# Altium PCB PCB_LED_6_ESP8266_0625.PcbDoc
Units mm, origin at the board's own origin, x right, y up, seen from the top; angles counter-clockwise.
Board outline 144 x 34 mm, 4 copper layers (Top Layer, Internal Plane 1, Internal Plane 2, Bottom Layer), stack 0.462 mm thick; 32 components, 31 nets, 212 pads, 244 vias.
Unrouted connection lines stored in the file: 6.
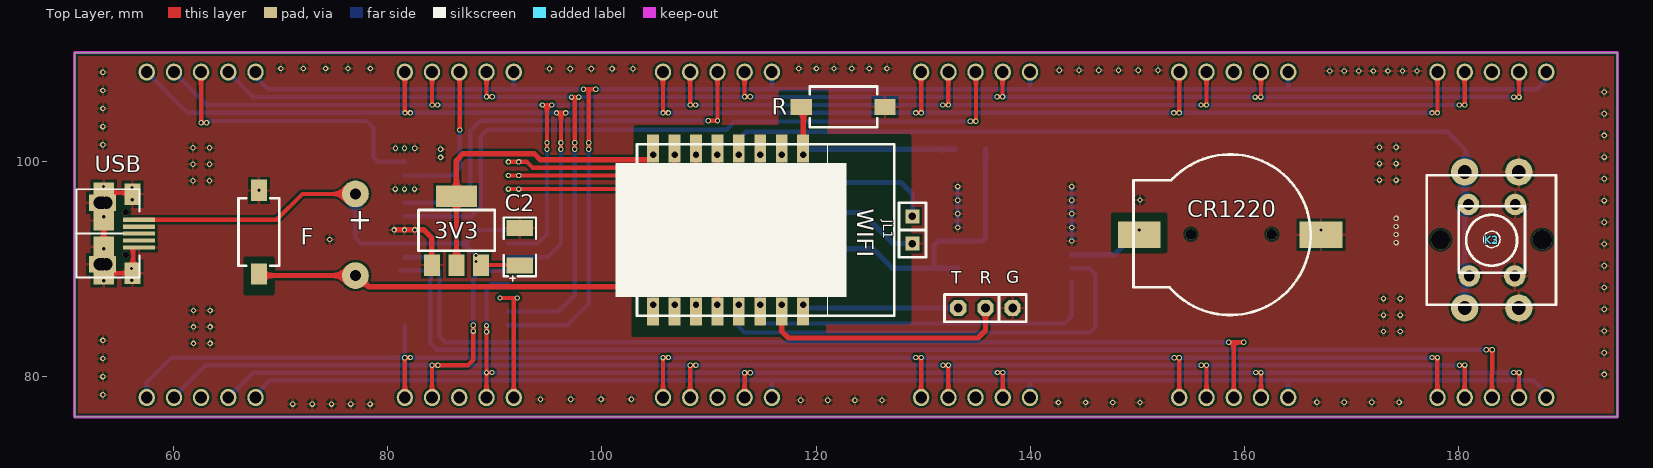
[diagram p0: Top Layer view]
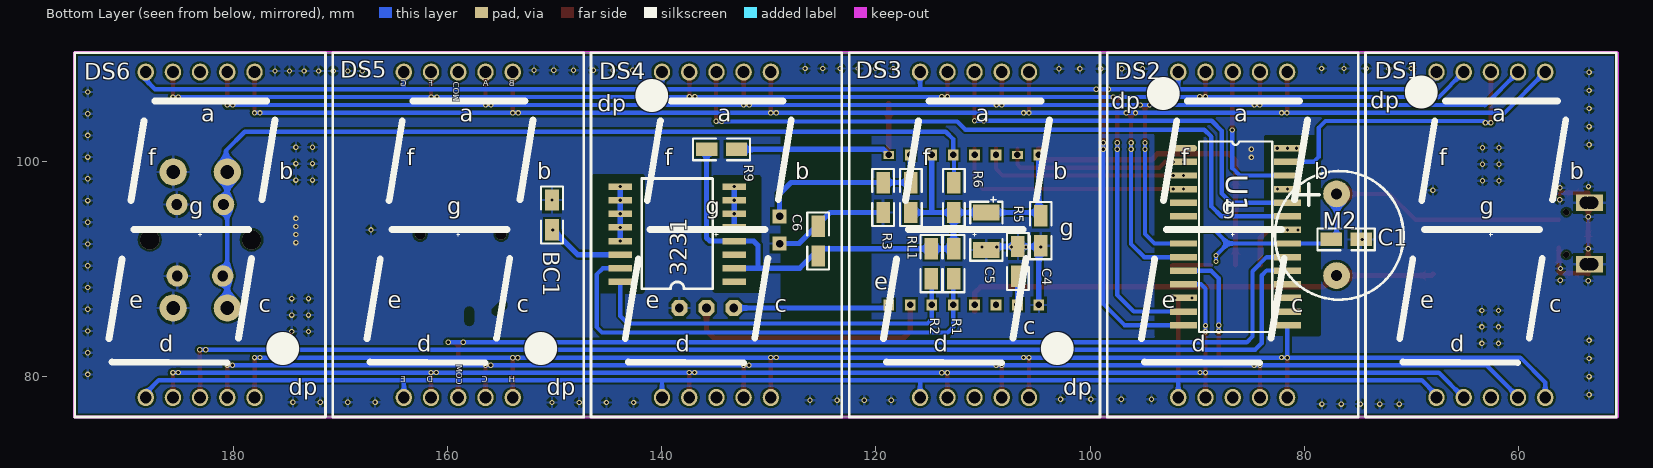
[diagram p1: Bottom Layer view, seen from below]
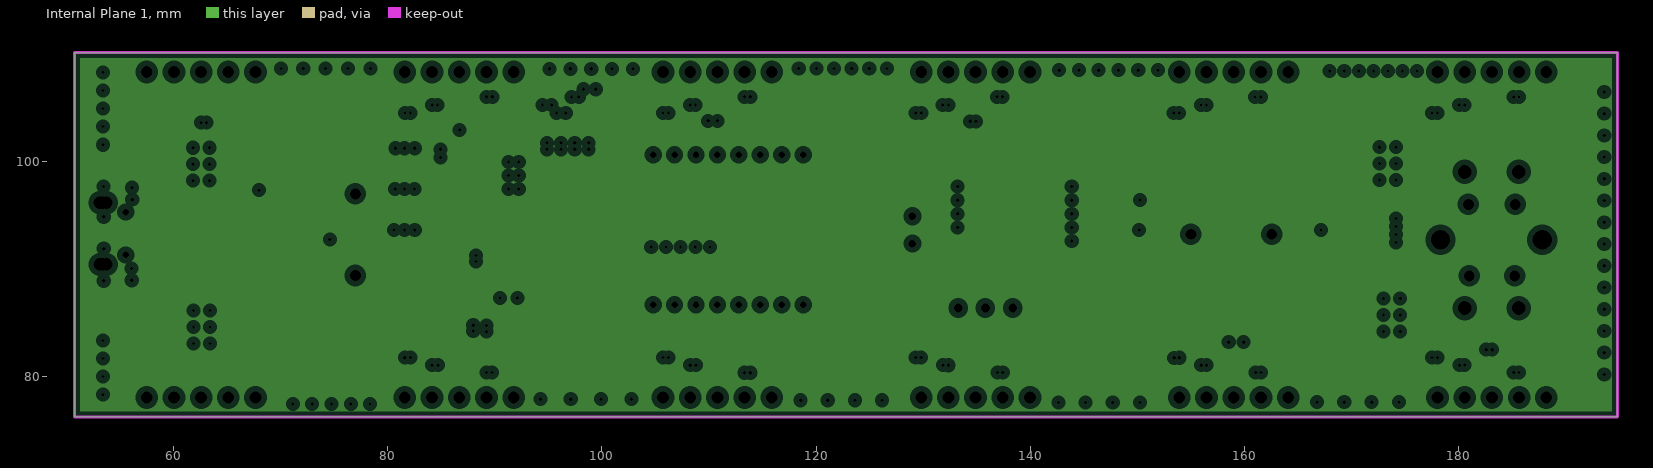
[diagram p2: Internal Plane 1, clearances drawn from the general rule]
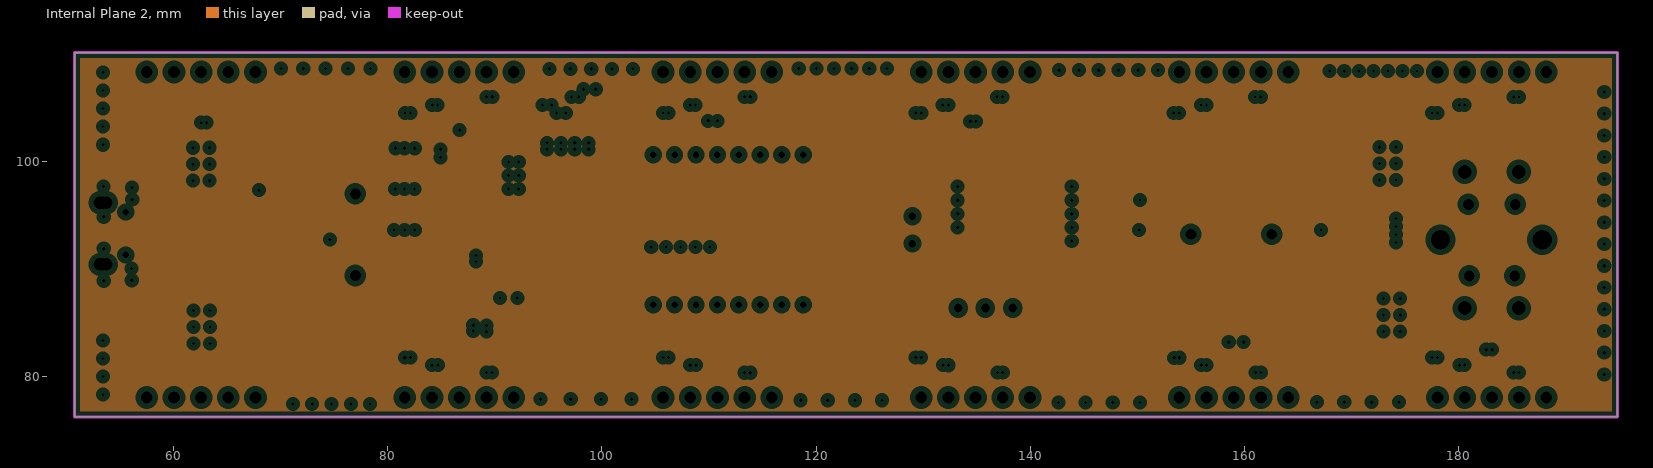
[diagram p3: Internal Plane 2, clearances drawn from the general rule]

## Layer stack, top to bottom
Top Solder: solder mask 0.0102, Solder Resist, Dk 3.5
Top Layer: signal copper 0.0356
Internal Plane 1: plane copper 0.0356
Internal Plane 2: plane copper 0.0356
Dielectric 1: dielectric 0.32, FR-4, Dk 4.8
Bottom Layer: signal copper 0.0356
Bottom Solder: solder mask 0.0102, Solder Resist, Dk 3.5

## Board outline
50.8,76.2 194.8,76.2 194.8,110.2 50.8,110.2

## Design rules (kind name [scope] priority, off if disabled: settings)
Clearance [All] p1: gap=0.2
PlaneClearance [All] p1: clearance=0.508
PlaneConnect [All] p1: planeconnectstyle=Relief reliefexpansion=0.508 reliefentries=4 reliefconductorwidth=0.254 reliefairgap=0.254
PolygonConnect [All] p1: connectstyle=Relief reliefconductorwidth=0.254 reliefentries=4 polygonreliefangle="90 Angle" airgapwidth=0.254
RoutingVias [All] p1: holewidth=0.6 width=1 viastyle="Through Hole" minholewidth=0.3 minwidth=0.5 maxholewidth=7 maxwidth=8
SolderMaskExpansion [All] p1: expansion=0.3
Width [All] p1: maxlimit=5 minlimit=0.4 preferedwidth=0.4
28 further rules are at their usual default settings.

## Components (designator, comment, footprint, x,y, rotation, side; value= is the part's Value field where it differs from the comment)
3V3 "AMS1117" SOT-223-1117 86.385,93.675 r0 top (schematic designator U2)
3231 "DS3231" IC-SOL-16-DS3231 133.223,88.798 r0 bottom (schematic designator U3)
BC1 "" 0805 150.241,93.904 r90 bottom
C1 "" 0805 77.267,92.761 r180 bottom
C2 "" C3528 92.354,90.322 r90 top
C4 "电容" 0805 104.623,94.717 r270 bottom
C5 "电容" C3528 109.703,95.275 r270 bottom
C6 "" 0805 125.4,91.465 r90 bottom
CR1220 "cr1220" CR1220 158.674,93.2 r180 top locked (schematic designator BT1)
DS1 "数码管1英寸" 1.0INCH-DISP 62.611,93.193 r180 bottom locked
DS2 "数码管1英寸" 1.0INCH-DISP 86.705,93.193 r180 bottom locked
DS3 "数码管1英寸" 1.0INCH-DISP 110.8,93.193 r180 bottom locked
DS4 "数码管1英寸" 1.0INCH-DISP 134.894,93.193 r180 bottom locked
DS5 "数码管1英寸" 1.0INCH-DISP 158.989,93.193 r180 bottom locked
DS6 "数码管1英寸" 1.0INCH-DISP 183.083,93.193 r180 bottom locked
F "FLASH" KEY-SMD 67.996,97.333 r270 top (schematic designator K1)
J2 "串口" PIN3 135.814,86.36 r180 top
JL1 "插座2PIN" PIN2 129.007,93.65 r90 top
K2 "按键" 按键6X6 183.083,92.728 r90 top locked
K3 "按键" 按键12X12-DIP 177.013,98.755 r270 top locked
M2 "蜂鸣器" 蜂鸣器 77.013,93.2 r90 bottom locked
R "" KEY-SMD 126.441,105.131 r180 top (schematic designator K5)
R1 "" 0805 112.751,91.643 r270 bottom
R2 "" 0805 114.833,91.643 r270 bottom
R3 "" 0805 119.329,97.815 r270 bottom
R5 "" 0805 106.756,89.56 r90 bottom
R6 "" 0805 112.725,95.529 r90 bottom
R9 "电阻" 0805 133.274,101.168 r0 bottom
RL1 "" 0805 116.738,95.529 r90 bottom
U1 "TM1628" IC-SOP-28 91.288,101.27 r180 bottom locked
USB "" USB_8 54.828,93.32 r90 top locked (schematic designator USB1)
WIFI "ESP-12E&F Module" "ESP-12E&F Module" 111.049,93.65 r270 top locked (schematic designator M1)

## Footprints (in the part's own frame and the unit in brackets; to place one, negate y for a bottom-side part, rotate by r counter-clockwise, add the part's x,y. Pads: shape width x height; smd on the part's side, far side on the other; paste and mask are expansions set on the pad)
1.0INCH-DISP [mm]
  oval 1.524x1.6 hole 1.1: a(2.54,15.189) b(5.08,15.189) c(2.54,-15.189) com(0,-15.189) com(0,15.189) d(-2.54,-15.189) dp(5.08,-15.189) e(-5.08,-15.189) f(-2.54,15.189) g(-5.08,15.189)
  silkscreen extent -11.71,-17.01 11.71,16.99
0805 [mm]
  rect 2x1.27 smd: 1(-0.254,0) 2(2.54,0)
  silkscreen extent -1.52,-1.02 3.81,1.02
C3528 [mm]
  rect 1.5x2.5 smd: 1(0,0) 2(3.5,0)
  silkscreen extent -1.45,-1.5 4.5,1.5
CR1220 [mm]
  rect 4x2.5 smd: 1(-8.458,0) 2(8.509,0)
  silkscreen extent -7.5,-7.5 9.04,7.5, body extent -9,-7.62 9.5,7.38, height 4.94
"ESP-12E&F Module" [mm]
  rect 2.6x1.1 smd: 1(-7.6,7.75) 2(-7.6,5.75) 3(-7.6,3.75) 4(-7.6,1.75) 5(-7.6,-0.25) 6(-7.6,-2.25) 7(-7.6,-4.25) 8(-7.6,-6.25) 15(7.6,-6.25) 16(7.6,-4.25) 17(7.6,-2.25) 18(7.6,-0.25) 19(7.6,1.75) 20(7.6,3.75) 21(7.6,5.75) 22(7.6,7.75)
  rect 0.762x1 hole 0.6: 1(-7,7.75) 7(-7,-4.25)
  rect 0.762x1 / inner rect 0.762x1 / far side rect 1x1 hole 0.6: 2(-7,5.75) 3(-7,3.75) 4(-7,1.75) 5(-7,-0.25) 6(-7,-2.25) 8(-7,-6.25) 15(7,-6.25) 16(7,-4.25) 17(7,-2.25) 18(7,-0.25) 19(7,1.75) 20(7,3.75) 21(7,5.75) 22(7,7.75)
  rect 0x0 smd mask+0: 9(-5,-7.75) 10(-3,-7.75) 11(-1,-7.75) 12(1,-7.75) 13(3,-7.75) 14(5,-7.75)
  silkscreen extent -8,-7.75 8,16.25
IC-SOL-16-DS3231 [mm]
  rect 2.2x0.61 smd: 1(0,0) 2(0,-1.27) 3(0,-2.54) 4(0,-3.81) 5(0,-5.08) 6(0,-6.35) 7(0,-7.62) 8(0,-8.89) 9(10.652,-8.89) 10(10.652,-7.62) 11(10.652,-6.35) 12(10.652,-5.08) 13(10.652,-3.81) 14(10.652,-2.54) 15(10.652,-1.27) 16(10.652,0)
  silkscreen extent 2.02,-9.65 8.64,0.64
IC-SOP-28 [mm]
  oval 2.5x0.6 smd: 1(0,0)
  rect 2.5x0.6 smd: 2(0,-1.27) 3(0,-2.54) 4(0,-3.81) 5(0,-5.08) 6(0,-6.35) 7(0,-7.62) 8(0,-8.89) 9(0,-10.16) 10(0,-11.43) 11(0,-12.7) 12(0,-13.97) 13(0,-15.24) 14(0,-16.51) 15(9.7,-16.51) 16(9.7,-15.24) 17(9.7,-13.97) 18(9.7,-12.7) 19(9.7,-11.43) 20(9.7,-10.16) 21(9.7,-8.89) 22(9.7,-7.62) 23(9.7,-6.35) 24(9.7,-5.08) 25(9.7,-3.81) 26(9.7,-2.54) 27(9.7,-1.27) 28(9.7,0)
  silkscreen extent 1.43,-17.14 8.27,0.63
KEY-SMD [mm]
  rect 2x1.5 smd: 1(0,0) 2(7.8,0)
  silkscreen extent 0.73,-1.9 7.03,1.9, body extent -0.06,-1.94 7.83,1.91, height 2.5
PIN2 [mm]
  rect 1.3x1.3 hole 0.7: 1(-1.27,0) 2(1.27,0)
  silkscreen extent -2.54,-1.27 2.54,1.27
PIN3 [mm]
  oct 1.5x1.5 hole 0.813: 1(-2.54,0) 2(0,0) 3(2.54,0)
  silkscreen extent -3.81,-1.27 3.81,1.27
SOT-223-1117 [mil]
  rect 59x79 smd: 1(-88,-130) 2(2.55,-130) 3(93.1,-130)
  rect 150x79 smd: 2(1.88,123.54)
  silkscreen extent -137,-78 143,72
USB_8 [mm]
  rect 1.9x1.9 smd: 0(-3.797,1.302) 0(-1.232,1.302) 0(1.207,1.302) 0(3.797,1.302)
  rect 2x1.5 smd: 0(-3.721,-1.365) 0(3.67,-1.365)
  round 1.27 hole 1.143: 0(-2.885,1.038) 0(-2.885,1.671) 0(2.865,1.038) 0(2.865,1.671)
  rect 1.524x2.54 hole 1.143: 0(-2.885,1.416) 0(2.865,1.416)
  rect 0.4x3 smd: 1(1.283,-1.994) 2(0.635,-1.994) 3(-0.013,-1.994) 4(-0.66,-1.994) 5(-1.308,-1.994)
  silkscreen extent -4.13,-2.03 4.13,3.88
按键6X6 [mm] "6X6"
  round 2 hole 1: 1(-3.373,2.116) 1(3.299,2.189) 2(-3.373,-2.134) 2(3.299,-2.172)
  silkscreen extent -3.06,-3.09 3.13,3.1, body extent -4.12,-3.27 4.14,3.23, height 4.3
按键12X12-DIP [mm]
  round 2.54 hole 1.27: 1(-0.303,3.532) 1(12.397,3.532) 2(-0.303,8.588) 2(12.397,8.588)
  silkscreen extent 0,0 12.09,12.07, body extent -0.45,0 12.55,12, height 7.3
蜂鸣器 [mm]
  round 2.5 hole 1: 1(3.81,0) 2(-3.81,0)
  silkscreen extent -6.06,-6.25 5.94,5.75

## Part data
BC1 C1 C2 C6: library part 电容
CR1220: library part 干电池, "Battery"
F R: library part 按键
J2: library part 插座3PIN
R1 R2 R3 R5 R6 RL1: library part 电阻
USB: library part USB

## Free pads (board coordinates)
  round 1 hole 1: 4(162.55,93.243) 5(154.994,93.243)

## Via types
v1: diameter 0.5, hole 0.3, Top Layer to Bottom Layer, 240 vias
v2: diameter 1.8, hole 1.8, Top Layer to Bottom Layer, tented both sides, 2 vias
v3: diameter 0.6, hole 0.6, Top Layer to Bottom Layer, 2 vias

## Nets (pads, with @x,y where several pads share a name; then routed paths per layer and width w, separated by ;. In a path a pad name is that pad's centre, name@x,y a point inside that pad or via, vN(x,y) a via of type N, cw(c..) or ccw(c..) an arc to the next point about the centre after c; other vN are vias at no path point)
3V3: 3V3.2 3231.2 3231.4 C4.1 C5.1 C6.1 R1.1 R2.1 R6.1 R9.2 RL1.1 WIFI.3 WIFI.8 | length 92
  Top Layer w0.5: 3V3.2@86.45,90.373 86.45,96.796 86.433,96.813 86.433,100.124 87.071,100.762 93.701,100.762 94.259,100.203 104.318,100.203 104.799,100.684 WIFI.8@104.799,101.25
  Bottom Layer w0.5: WIFI.8@104.799,100.65 104.799,95.531 105.054,95.275 R6.1 ; WIFI.3@114.799,100.65 114.799,95.292 114.783,95.275 ; RL1.1 114.783,95.275 ; 3231.2 131.013,90.068 ; R9.2 135.814,92.913 135.509,92.608 3231.4 131.42,92.608 131.013,92.202 131.013,90.068 ; R6.1 114.783,95.275 ; R6.1 112.751,95.25 R1.1 R2.1 125.298,91.897 127.127,90.068 131.013,90.068
A: DS1.a DS2.a DS3.a DS4.a DS5.a DS6.a U1.8 | length 157.2
  Top Layer w0.4: DS2.a 84.165,105.319 v1(84.176,105.308) v1(84.684,105.308) ; v1(94.463,105.308) 94.894,105.308 ; v1(94.894,101.168) v1(94.894,101.778) 94.894,105.308 ; v1(95.326,105.308) 94.894,105.308 ; DS3.a 108.255,108.377 v1(108.255,105.308) v1(108.763,105.308) ; v1(131.826,105.308) v1(132.359,105.308) 132.354,105.314 DS4.a ; v1(155.931,105.308) v1(156.439,105.308) 156.439,108.372 DS5.a ; v1(180.035,105.308) v1(180.543,105.308) DS6.a
  Bottom Layer w0.4: DS1.a 63.17,105.283 ; 63.17,105.308 v1(84.176,105.308) v1(84.684,105.308) v1(94.463,105.308) v1(95.326,105.308) v1(108.255,105.308) v1(108.763,105.308) v1(131.826,105.308) v1(132.359,105.308) v1(155.931,105.308) v1(156.439,105.308) v1(180.035,105.308) v1(180.543,105.308) ; U1.8 94.005,92.38 94.894,93.269 v1(94.894,101.168) v1(94.894,101.778)
ADC: JL1.2 R3.1 RL1.2 WIFI.2 | length 17.3
  Bottom Layer w0.5: WIFI.2@116.799,100.65 116.799,98.13 116.859,98.069 R3.1 127.94,98.069 129.007,97.003 JL1.2
B: DS1.b DS2.b DS3.b DS4.b DS5.b DS6.b U1.9 | length 162.8
  Top Layer w0.4: DS2.b 81.625,104.582 v1(81.636,104.572) v1(82.144,104.572) ; v1(95.783,104.572) 96.19,104.572 ; v1(96.19,101.168) v1(96.19,101.778) 96.19,104.572 ; v1(96.647,104.572) 96.19,104.572 ; DS3.b 105.715,108.377 v1(105.715,104.572) v1(106.223,104.572) ; v1(129.311,104.572) v1(129.819,104.572) 129.814,104.577 DS4.b ; v1(153.391,104.572) v1(153.899,104.572) 153.909,104.582 DS5.b ; v1(177.495,104.572) v1(178.003,104.572) DS6.b
  Bottom Layer w0.4: DS1.b 61.341,104.572 v1(81.636,104.572) v1(82.144,104.572) v1(95.783,104.572) v1(96.647,104.572) v1(105.715,104.572) v1(106.223,104.572) v1(129.311,104.572) v1(129.819,104.572) v1(153.391,104.572) v1(153.899,104.572) v1(177.495,104.572) v1(178.003,104.572) ; U1.9 94.971,91.11 96.19,92.329 v1(96.19,101.168) v1(96.19,101.778)
C: DS1.c DS2.c DS3.c DS4.c DS5.c DS6.c U1.10 | length 155.7
  Top Layer w0.4: DS2.c v1(84.165,81.026) 87.528,81.026 88.011,81.509 v1(88.011,84.201) v1(88.011,84.76) ; DS3.c v1(108.26,81.026) v1(108.788,81.026) ; v1(131.851,81.026) v1@132.349,81.026 ; DS4.c v1(132.354,81.021) ; v1(155.956,81.026) v1(156.449,81.026) DS5.c ; v1(180.061,81.026) 180.54,81.026 DS6.c@180.54,78.007
  Bottom Layer w0.4: DS1.c@59.69,77.953 59.969,77.953 63.046,81.029 v1(180.543,81.029) ; DS1.c 60.071,78.359 DS1.c@60.277,78.565 ; v1(88.011,84.201) v1(88.011,84.76) 88.011,89.129 88.722,89.84 U1.10
  other v1: 84.709,81.026
CLK: U1.3 WIFI.6 | length 19.7
  Top Layer w0.4: v1(91.288,98.73) v1(92.253,98.73) 108.179,98.73 108.799,99.35 108.799,100.65 WIFI.6@108.799,101.25
D: DS1.d DS2.d DS3.d DS4.d DS5.d DS6.d U1.11 | length 146.2
  Top Layer w0.4: DS2.d v1(89.245,80.33) ; v1(89.245,84.719) v1(89.245,80.33) ; v1@89.753,80.33 v1(89.245,80.33) ; DS3.d v1(113.34,80.32) v1@113.863,80.32 ; v1(136.931,80.34) v1@137.429,80.34 ; DS4.d v1(137.434,80.335) ; v1(161.036,80.34) v1@161.519,80.34 ; DS5.d v1(161.529,80.33) ; v1(185.115,80.34) 185.126,80.329 v1(185.623,80.329) DS6.d
  Bottom Layer w0.4: DS1.d 67.476,80.329 v1(185.623,80.329) ; v1(89.256,84.15) 89.256,88.163 89.662,88.57 U1.11
  other v1: 113.868,80.315 89.764,80.34
DIO: U1.2 WIFI.7 | length 17.4
  Top Layer w0.4: v1(91.288,100) v1(92.253,100) 93.015,100 93.574,99.441 106.486,99.441 106.799,99.753 106.799,100.65 WIFI.7@106.799,101.25
E: DS1.e DS2.e DS3.e DS4.e DS5.e DS6.e U1.12 | length 139.8
  Top Layer w0.4: v1(90.5,87.3) 91.669,87.299 ; DS2.e 91.785,87.182 91.669,87.299 ; v1(92.126,87.3) 92.151,87.298 92.126,87.298 91.669,87.299
  Bottom Layer w0.4: DS1.e 67.691,78.257 69.063,79.629 91.745,79.629 ; DS2.e 91.785,79.588 91.745,79.629 ; DS3.e 115.88,79.583 115.926,79.629 ; DS4.e 139.974,79.558 139.903,79.629 ; DS5.e 164.069,79.568 164.008,79.629 ; DS6.e 188.163,78.41 186.944,79.629 164.008,79.629 ; 91.745,79.629 115.926,79.629 ; 115.926,79.629 139.903,79.629 ; 139.903,79.629 164.008,79.629
F: DS1.f DS2.f DS3.f DS4.f DS5.f DS6.f U1.13 | length 162.3
  Top Layer w0.4: DS2.f@89.256,108.372 v1(89.256,106.07) v1(89.789,106.07) ; v1(97.18,106.045) v1(97.866,106.045) ; v1(97.485,101.168) v1(97.485,101.778) 97.485,106.045 ; DS3.f@113.335,108.377 v1(113.335,106.07) v1(113.868,106.07) ; v1(136.906,106.07) v1(137.414,106.07) 137.414,108.362 DS4.f ; v1(160.985,106.045) v1(161.519,106.045) 161.529,106.055 DS5.f ; v1(185.115,106.045) v1(185.623,106.045) DS6.f
  Bottom Layer w0.4: DS1.f 67.514,106.02 ; 67.514,106.045 v1(97.18,106.045) v1(97.866,106.045) v1(160.985,106.045) v1(161.519,106.045) v1(185.115,106.045) v1(185.623,106.045) ; U1.13 95.936,86.03 97.485,87.579 v1(97.485,101.168) v1(97.485,101.778)
FLASH: F.2 M2.2 WIFI.18 | length 45.6
  Top Layer w0.5: F.2 68.139,89.39 M2.2 ; M2.2@77.013,89.84 77.013,89.56 78.232,88.341 110.211,88.341 110.799,87.753 110.799,86.65 WIFI.18@110.799,86.05
G: DS1.g DS2.g DS3.g DS4.g DS5.g DS6.g U1.14 | length 159
  Top Layer w0.4: v1(98.298,106.782) v1(99.441,106.782) ; v1(98.781,101.168) v1(98.781,101.778) 98.781,106.756
  Bottom Layer w0.4: DS1.g 67.691,107.95 68.859,106.782 91.77,106.782 ; U1.14 96.799,84.76 98.781,86.741 v1(98.781,101.168) v1(98.781,101.778) ; DS2.g 91.785,106.797 91.77,106.782 ; DS3.g 115.88,106.878 115.976,106.782 ; DS4.g 139.974,106.787 139.979,106.782 ; DS5.g 164.069,106.822 164.109,106.782 ; DS6.g 188.163,107.645 187.3,106.782 164.109,106.782 ; 91.77,106.782 v1(98.298,106.782) v1(99.441,106.782) 115.976,106.782 ; 115.976,106.782 139.979,106.782 ; 139.979,106.782 164.109,106.782
GND: 3V3.1 3231.5 3231.6 3231.7 3231.8 3231.9 3231.10 3231.11 3231.12 3231.13 BC1.2 C1.2 C2.2 C4.2 C5.2 C6.2 CR1220.1 F.1 J2.1 JL1.1 K2.2 K3.2 R3.2 R5.2 R.1 U1.22 U1.25 U1.28 USB.0 USB.5 WIFI.15 | length 53.5
  Top Layer w0.4: USB.0@56.193,96.99 56.066,97.117 53.526,97.117 53.526,94.526 53.526,92.088 53.526,89.522 53.602,89.599 56.193,89.599 USB.0@56.244,89.649 ; USB.0@56.244,89.649 56.244,90.987 56.262,91.005 ; USB.0@56.244,89.649 56.262,89.668 56.262,91.005 ; 56.262,91.005 USB.5@56.262,91.993 ; USB.5@56.262,91.993 56.262,92.012 56.244,92.012 USB.5@56.262,91.993
  Top Layer w0.5: v1(80.62,93.65) v1(81.588,93.65) v1(82.55,93.65) 83.414,93.65 84.15,92.913 3V3.1
  Bottom Layer w0.5: WIFI.15@104.799,86.65 104.799,92.1 R5.2 109.378,92.1 C5.2 ; R3.2 124.282,95.275 127.178,92.38 JL1.1 ; v1(133.223,93.878) v1(133.223,95.148) v1(133.223,96.418) v1(133.223,97.688) ; v1(143.875,92.608) v1(143.875,93.878) v1(143.875,95.148) v1(143.875,96.418) v1(143.875,97.688)
  other v1: 71.171,77.394 72.974,77.394 74.778,77.394 76.581,77.394 78.384,77.394 142.621,77.546 145.161,77.546 147.701,77.546 150.241,77.546 166.751,77.572 169.308,77.572 171.865,77.572 174.422,77.572 118.567,77.749 121.099,77.749 123.63,77.749 126.162,77.749 94.285,77.851 97.113,77.851 99.941,77.851 102.768,77.851 53.442,78.27 53.442,79.959 193.573,80.162 53.442,81.648 193.573,82.19 61.9,83.058 63.449,83.058 53.442,83.337 172.974,84.163 174.523,84.163 193.573,84.219 61.9,84.595 63.449,84.595 172.974,85.7 174.523,85.7 61.9,86.131 63.449,86.131 193.573,86.247 172.974,87.236 174.523,87.236 193.573,88.275 53.518,88.9 56.134,88.951 56.109,90.043 193.573,90.303 53.518,91.897 104.623,92.05 105.994,92.05 107.366,92.05 108.737,92.05 110.109,92.05 193.573,92.331 174.142,92.466 74.625,92.761 174.142,93.218 167.132,93.65 174.142,93.97 193.573,94.359 174.142,94.722 53.518,94.869 193.573,96.387 150.241,96.444 56.185,96.469 68.021,97.358 80.721,97.46 81.588,97.46 82.525,97.46 56.159,97.587 53.492,97.688 61.849,98.247 63.398,98.247 172.593,98.298 174.142,98.298 193.573,98.415 61.849,99.784 63.398,99.784 172.593,99.835 174.142,99.835 84.963,100.416 193.573,100.443 84.963,101.168 80.747,101.27 81.588,101.27 82.55,101.27 61.849,101.321 63.398,101.321 172.593,101.371 174.142,101.371 53.442,101.6 193.573,102.471 53.442,103.289 193.573,104.499 53.442,104.978 193.573,106.528 53.442,106.667 53.442,108.356 167.945,108.483 169.304,108.483 170.663,108.483 172.022,108.483 173.38,108.483 174.739,108.483 176.098,108.483 142.697,108.56 144.541,108.56 146.385,108.56 148.229,108.56 150.073,108.56 151.917,108.56 95.123,108.687 97.072,108.687 99.022,108.687 100.971,108.687 102.921,108.687 70.053,108.712 72.142,108.712 74.231,108.712 76.321,108.712 78.41,108.712 118.389,108.712 120.035,108.712 121.681,108.712 123.327,108.712 124.973,108.712 126.619,108.712
GPIO15: R5.1 WIFI.16 | length 2.7
  Bottom Layer w0.5: R5.1 106.799,89.264 WIFI.16@106.799,86.65
GPIO16: K2.1 K3.1 R6.2 WIFI.4 | length 87.2
  Bottom Layer w0.4: R6.2 112.725,100.576 112.799,100.65 112.799,102.131 113.487,102.819 178.918,102.819 180.67,101.067 180.67,99.817 K3.1@180.894,99.593 ; K3.1@180.545,86.358 K3.1@180.545,99.058
H: DS1.dp DS2.dp DS3.dp DS4.dp DS5.dp DS6.dp U1.15 | length 147
  Top Layer w0.4: DS2.dp v1(81.625,81.727) v1@82.133,81.727 ; DS3.dp v1(105.72,81.732) v1@106.218,81.732 ; v1(129.311,81.737) v1@129.809,81.737 ; DS4.dp v1(129.814,81.742) ; v1(153.441,81.712) v1@153.899,81.712 ; DS5.dp v1(153.909,81.722) ; v1(177.495,81.737) 177.995,81.737 DS6.dp@177.995,78.012
  Bottom Layer w0.4: DS1.dp 57.531,79.402 59.858,81.729 v1@81.625,81.729 ; U1.15 81.625,84.722 v1@81.625,81.729 ; v1(81.625,81.727) v1@81.625,81.729 ; v1(178.003,81.729) v1@81.625,81.729
  other v1: 82.144,81.737 106.223,81.737
LED1: DS1.com U1.27 | length 27.4
  Top Layer w0.4: DS1.com@62.611,108.382 v1(62.611,103.657) v1(63.119,103.657)
  Bottom Layer w0.4: v1(62.611,103.657) v1(63.119,103.657) 63.271,103.81 78.054,103.81 78.689,103.175 78.689,100.457 79.146,100 U1.27
LED2: DS2.com U1.26 | length 14.4
  Top Layer w0.4: DS2.com@86.705,108.382 86.741,108.347 v1(86.741,102.972)
  Bottom Layer w0.4: U1.26 86.055,98.73 86.741,99.416 v1(86.741,102.972)
LED3: DS3.com U1.24 | length 41.2
  Top Layer w0.4: v1(109.936,103.83) v1(110.8,103.83) DS3.com@110.8,108.382
  Bottom Layer w0.4: U1.24 86.868,96.19 87.732,97.053 87.732,102.895 88.666,103.83 v1(110.8,103.83)
LED4: DS4.com U1.23 | length 65.9
  Top Layer w0.4: v1(134.391,103.784) v1(134.925,103.784) 134.925,108.352 DS4.com@134.894,108.382
  Bottom Layer w0.4: U1.23 87.782,94.92 88.697,95.834 88.697,102.337 89.357,102.997 111.658,102.997 112.42,103.759 v1@134.92,103.759
LED5: DS5.com U1.20 | length 91.8
  Top Layer w0.4: v1(158.521,83.169) 158.979,83.169 ; 158.979,83.185 158.979,83.169 ; DS5.com@158.989,78.004 158.989,81.549 158.979,81.559 158.979,83.169 ; v1(159.918,83.169) 158.979,83.169
  Bottom Layer w0.4: U1.20 83.541,91.11 84.861,89.789 84.861,83.693 85.385,83.169 v1(158.521,83.169) v1(159.918,83.169)
LED6: DS6.com U1.19 | length 113.7
  Top Layer w0.4: v1(182.55,82.474) v1(183.109,82.474) DS6.com@183.083,78.004
  Bottom Layer w0.4: U1.19@81.204,89.865 83.541,89.865 83.998,89.408 83.998,83.083 84.607,82.474 v1(182.55,82.474) v1(183.109,82.474)
NetJ9_2: 
RST: R9.1 R.2 WIFI.1 | length 18.6
  Top Layer w0.5: WIFI.1@118.799,101.25 118.819,101.27 R.2@118.819,105.435
  Bottom Layer w0.5: WIFI.1@118.799,100.65 119.317,101.168 R9.1
RX: J2.2 WIFI.21 | length 23.5
  Top Layer w0.5: WIFI.21@116.799,86.05 116.799,84.191 117.424,83.566 135.103,83.566 135.814,84.277 J2.2
SCL: 3231.16 R2.2 WIFI.20 | length 36.5
  Bottom Layer w0.4: R2.2 114.799,89.069 114.799,86.65 114.799,85.309 115.196,84.912 143.164,84.912 143.875,85.623 3231.16
SDA: 3231.15 R1.2 WIFI.19 | length 45.6
  Bottom Layer w0.4: R1.2 112.799,89.055 112.799,86.65 112.799,84.585 113.309,84.074 145.567,84.074 146.075,84.582 146.075,89.484 145.491,90.068 3231.15
STB: U1.4 WIFI.5 | length 22.9
  Top Layer w0.4: v1(91.288,97.46) v1(92.253,97.46) 110.058,97.46 110.799,98.2 110.799,100.65 WIFI.5@110.799,101.25
TX: J2.3 WIFI.22 | length 14.6
  Bottom Layer w0.5: WIFI.22@118.799,86.65 119.089,86.36 J2.3
VBAT: 3231.14 BC1.1 CR1220.2 | length 7.2
  Bottom Layer w0.5: 3231.14 147.853,91.338 v1(150.165,93.65)
VCC: 3V3.3 C1.1 C2.1 M2.1 U1.7 U1.21 USB.1 | length 46.7
  Top Layer w0.4: USB.1@56.244,94.602 USB.1 69.66,94.602 72.067,97.01 M2.1 ; 3V3.3 92.304,90.373 C2.1
  Bottom Layer w0.4: M2.1 77.013,92.888 77.521,92.38 U1.21 87.147,92.38 ; v1(88.265,90.703) v1(88.265,91.262) 87.147,92.38 ; U1.7 88.417,93.65 87.147,92.38
pads on no net: 3231.1 3231.3 U1.1 U1.5 U1.6 U1.16 U1.17 U1.18 USB.2 USB.3 USB.4 WIFI.9 WIFI.10 WIFI.11 WIFI.12 WIFI.13 WIFI.14 WIFI.17
copper on no net:
  other v2: 178.283,92.735 187.782,92.735
  other v3: 55.562,91.314 55.562,95.314

## Polygon pours and split planes (outlines as drawn)
GND on Bottom Layer "Bottom Layer-No Net" (solid, pour order 44): 50.8,110.2 194.8,110.2 194.8,76.2 50.8,76.2
GND on Top Layer "Bottom Layer-No Net" (solid, pour order 50): 50.8,110.2 194.8,110.2 194.8,76.2 50.8,76.2

## Keep-outs
Keep-Out Layer:
  the board outline again, w0.3

## Silkscreen, mask and mechanical layers (free items; w line width, h text height)
Top Overlay:
  rectangle: 101.27,87.401 122.834,99.898
  text "+" at 76.276,93.675 h2
  text "G" at 137.744,88.236 h2
  text "T" at 132.639,88.214 h2
  text "R" at 135.306,88.214 h2
Bottom Overlay:
  text "COM" at 158.674,107.467 h1 r270
  text "B" at 153.695,106.832 h1
  text "A" at 156.134,106.832 h1
  text "F" at 161.315,106.832 h1
  text "G" at 163.779,106.821 h1
  text "H" at 153.67,79.197 h1
  text "C" at 156.223,79.208 h1
  text "COM" at 159.426,79.197 h1 r90
  text "D" at 161.328,79.197 h1
  text "E" at 163.881,79.197 h1

## Text inside footprints (layer, text, board x,y; h text height)
DS1: Bottom Overlay "a" at 62.484,103.734 h1.52; Bottom Overlay "b" at 55.245,98.4 h1.52; Bottom Overlay "c" at 57.15,85.954 h1.52; Bottom Overlay "d" at 66.421,82.271 h1.52; Bottom Overlay "e" at 69.215,86.335 h1.52; Bottom Overlay "f" at 67.437,99.67 h1.52; Bottom Overlay "dp" at 71.171,106.172 h1.52 r180; Bottom Overlay "g" at 63.627,95.098 h1.52; Bottom Overlay "●" at 70.815,104.496 h5
DS2: Bottom Overlay "a" at 86.578,103.734 h1.52; Bottom Overlay "b" at 79.096,98.4 h1.52; Bottom Overlay "c" at 81.244,85.954 h1.52; Bottom Overlay "d" at 90.515,82.271 h1.52; Bottom Overlay "e" at 93.309,86.335 h1.52; Bottom Overlay "f" at 91.531,99.67 h1.52; Bottom Overlay "dp" at 95.326,106.121 h1.52 r180; Bottom Overlay "g" at 87.721,95.098 h1.52; Bottom Overlay "●" at 94.92,104.369 h5
DS3: Bottom Overlay "a" at 110.673,103.734 h1.52; Bottom Overlay "b" at 103.434,98.4 h1.52; Bottom Overlay "c" at 106.248,83.922 h1.52; Bottom Overlay "d" at 114.61,82.271 h1.52; Bottom Overlay "e" at 120.167,88.062 h1.52; Bottom Overlay "f" at 115.626,99.67 h1.52; Bottom Overlay "dp" at 102.545,78.207 h1.52; Bottom Overlay "g" at 102.845,93.091 h1.52; Bottom Overlay "●" at 104.805,80.544 h5
DS4: Bottom Overlay "a" at 134.767,103.734 h1.52; Bottom Overlay "b" at 127.528,98.4 h1.52; Bottom Overlay "c" at 129.433,85.954 h1.52; Bottom Overlay "d" at 138.704,82.271 h1.52; Bottom Overlay "e" at 141.498,86.335 h1.52; Bottom Overlay "f" at 139.72,99.67 h1.52; Bottom Overlay "dp" at 143.307,105.893 h1.52 r180; Bottom Overlay "g" at 135.91,95.098 h1.52; Bottom Overlay "●" at 142.672,104.165 h5
DS5: Bottom Overlay "a" at 158.862,103.734 h1.52; Bottom Overlay "b" at 151.623,98.4 h1.52; Bottom Overlay "c" at 153.528,85.954 h1.52; Bottom Overlay "d" at 162.799,82.271 h1.52; Bottom Overlay "e" at 165.593,86.335 h1.52; Bottom Overlay "f" at 163.815,99.67 h1.52; Bottom Overlay "dp" at 150.734,78.207 h1.52; Bottom Overlay "g" at 160.005,95.098 h1.52; Bottom Overlay "●" at 152.994,80.544 h5
DS6: Bottom Overlay "a" at 182.956,103.734 h1.52; Bottom Overlay "b" at 175.717,98.4 h1.52; Bottom Overlay "c" at 177.622,85.954 h1.52; Bottom Overlay "d" at 186.893,82.271 h1.52; Bottom Overlay "e" at 189.687,86.335 h1.52; Bottom Overlay "f" at 187.909,99.67 h1.52; Bottom Overlay "dp" at 174.828,78.207 h1.52; Bottom Overlay "g" at 184.099,95.098 h1.52; Bottom Overlay "●" at 177.089,80.544 h5